# Altium PCB Smart_DCDC_v5.PCBDOC (part 1 of 2)
Units mm, origin at the board's own origin, x right, y up, seen from the top; angles counter-clockwise.
Board outline 122.55 x 122.29 mm, 2 copper layers (Top Layer, Bottom Layer); 183 components, 138 nets, 550 pads, 99 vias.
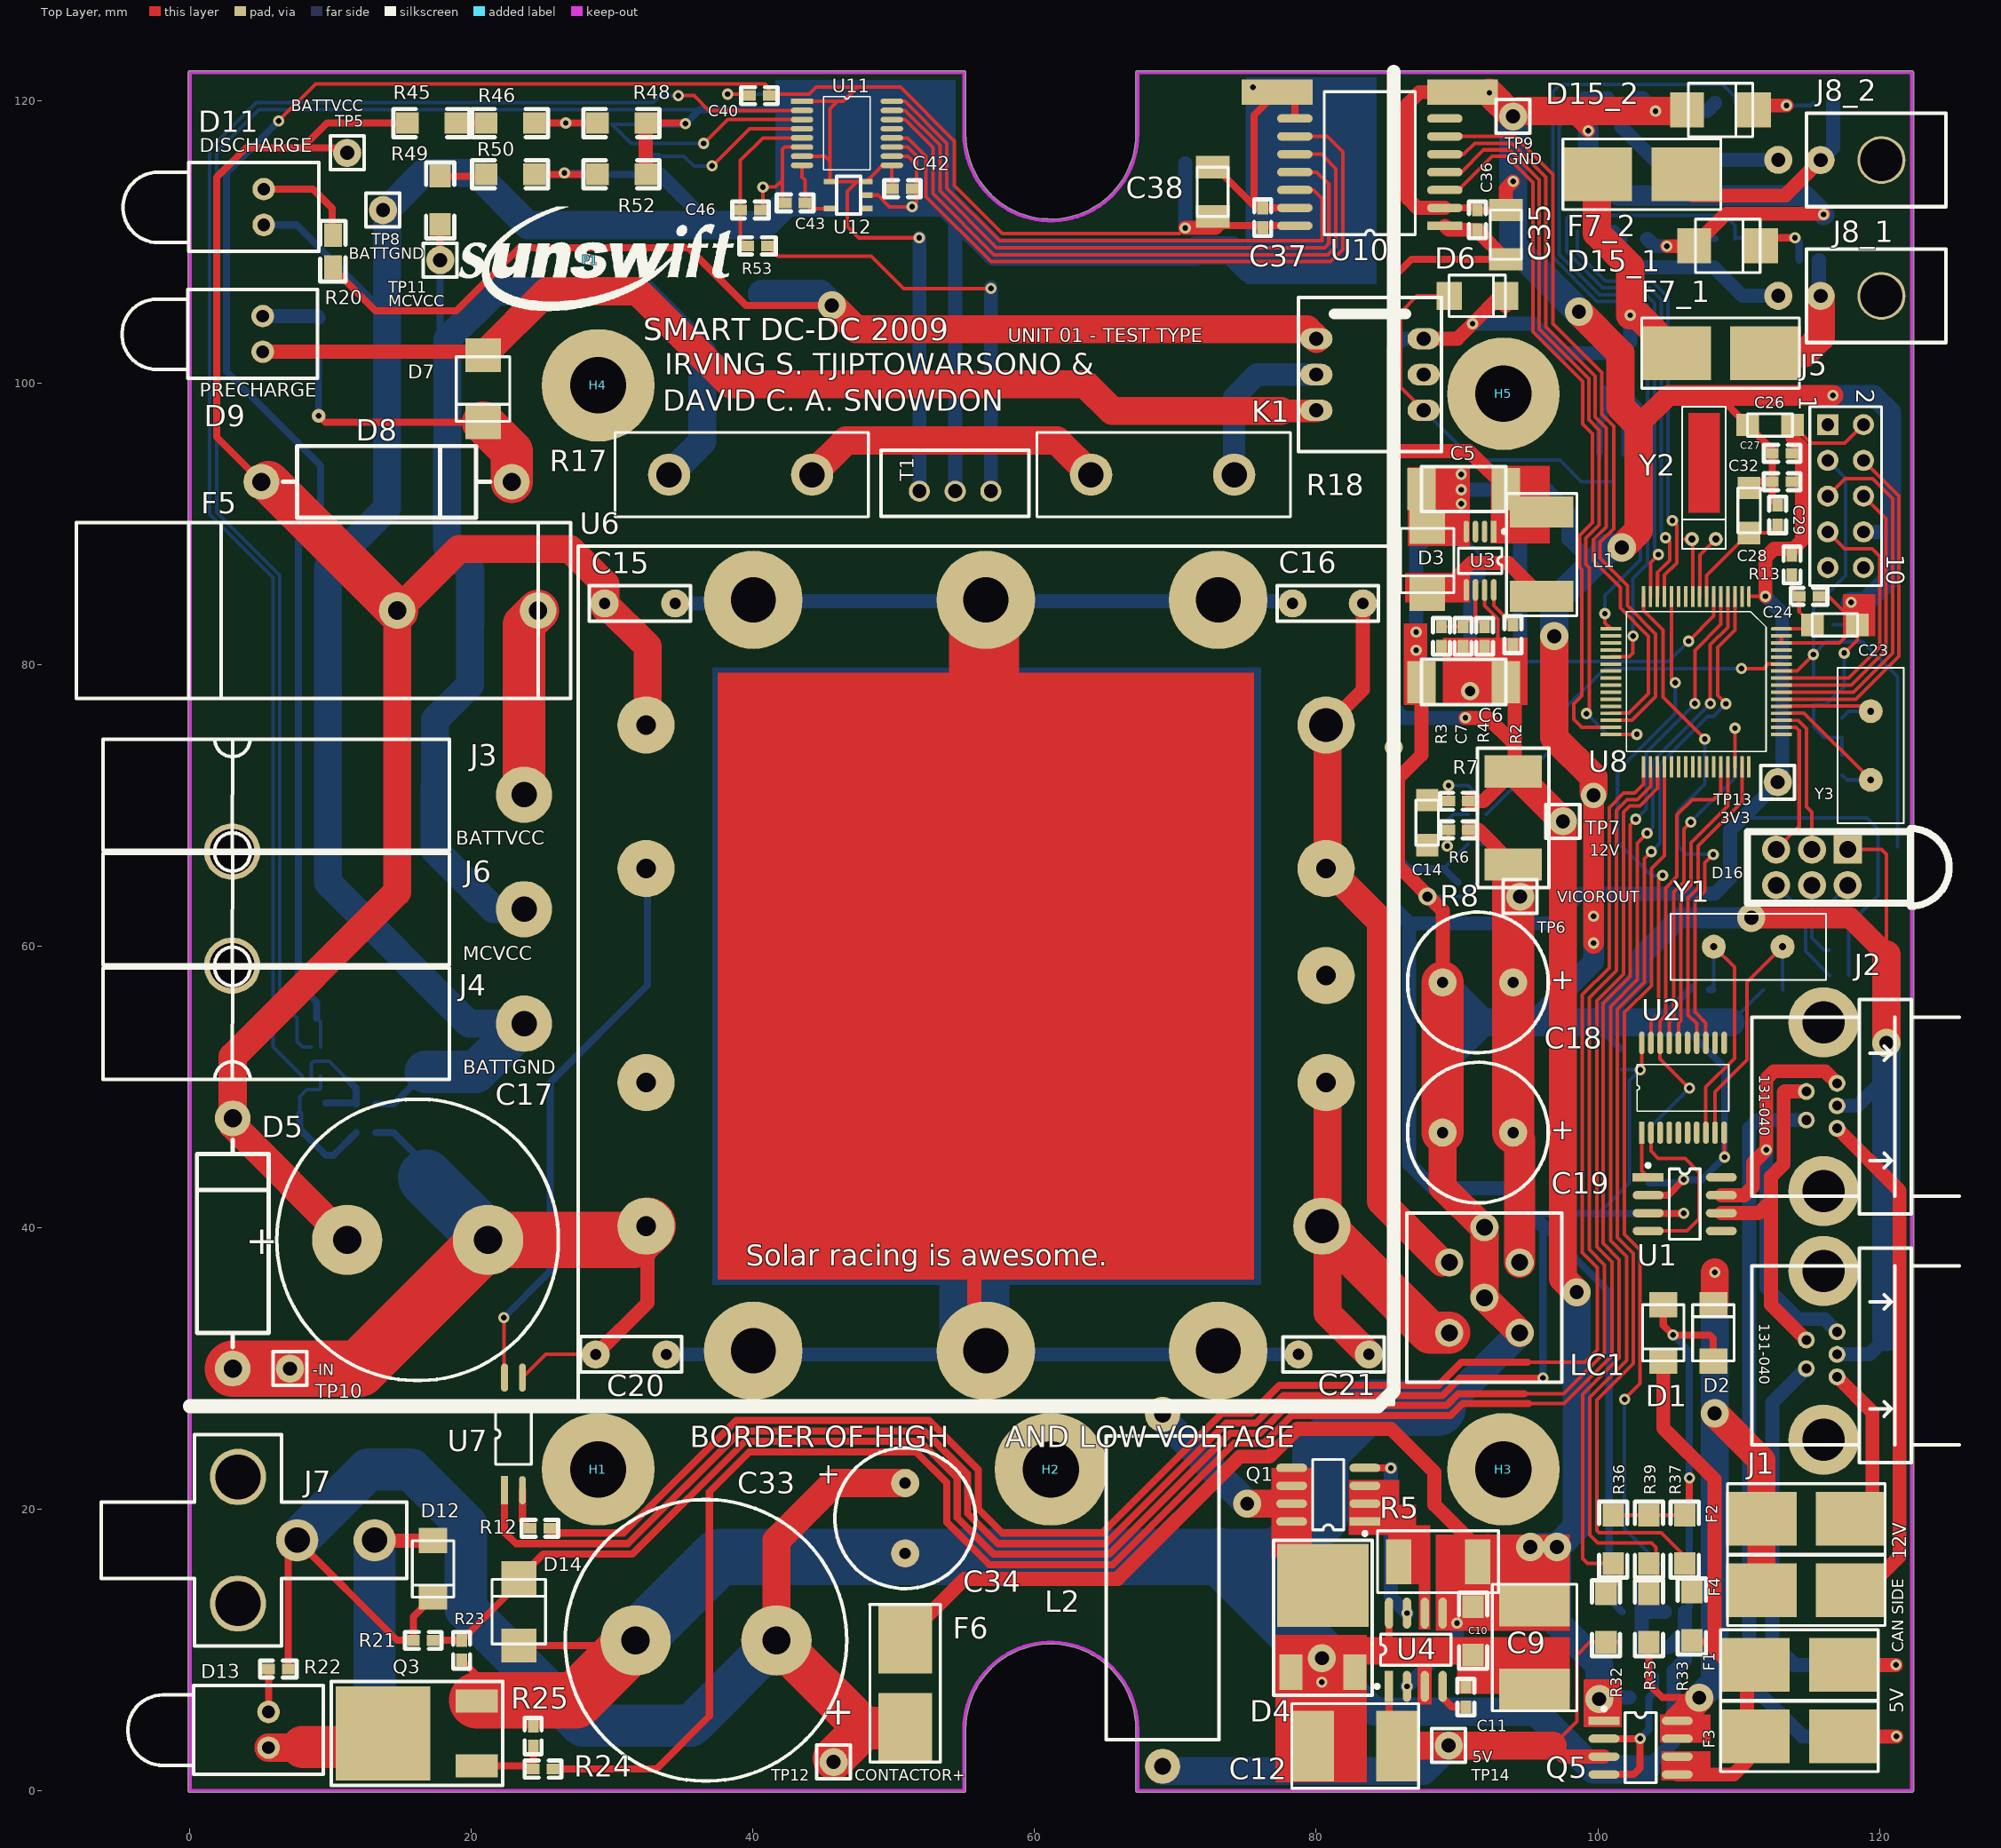
[diagram p0: Top Layer view]
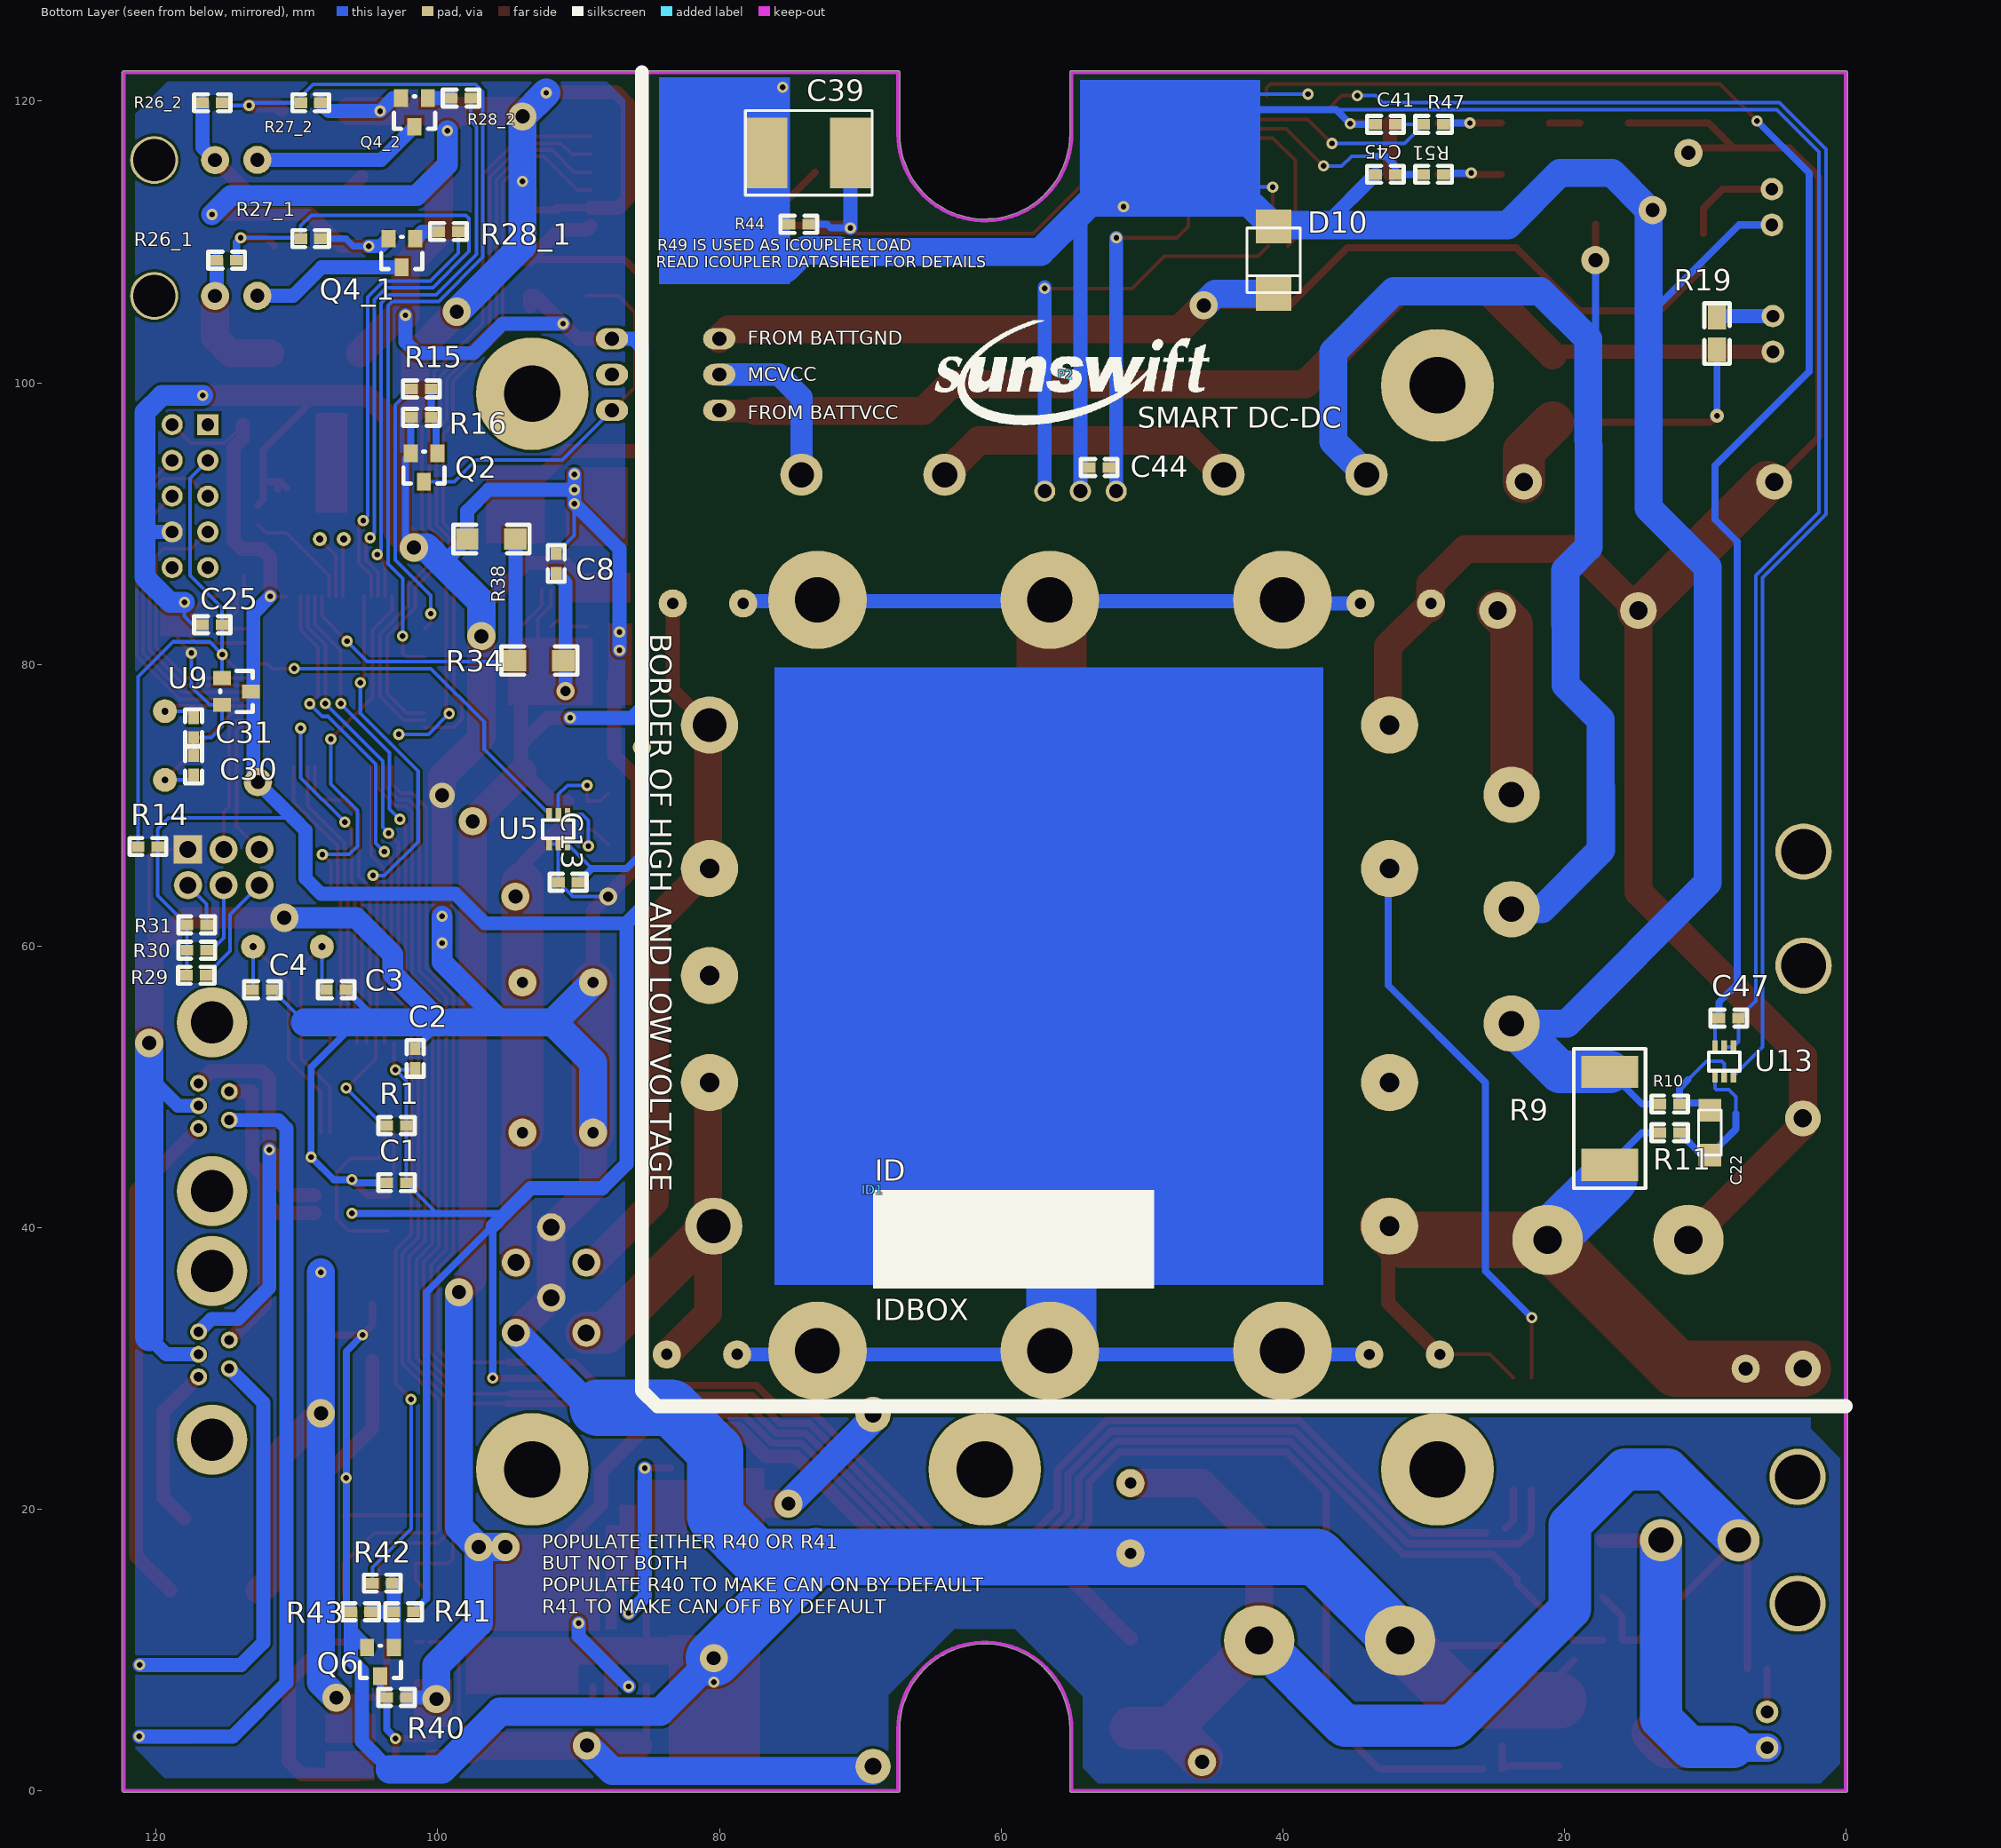
[diagram p1: Bottom Layer view, seen from below]

## Layer stack, top to bottom
Top Layer: signal copper 0.0356
Dielectric: dielectric 0.32, FR-4, Dk 4.8
Bottom Layer: signal copper 0.0356

## Board outline
0,-0.127 54.98,-0.127 ccw(c54.98,0) 55.107,0 55.107,4.33 ccw(c54.985,4.365) 55.112,4.365 cw(c61.15,4.365) 67.188,4.4 ccw(c67.31,4.365) 67.183,4.365 67.183,0 ccw(c67.31,0) 67.31,-0.127 122.3,-0.127 ccw(c122.3,0) 122.427,0 122.427,122.04 ccw(c122.3,122.04) 122.3,122.167 67.31,122.167 ccw(c67.31,122.04) 67.183,122.04 67.183,117.675 ccw(c67.31,117.675) 67.188,117.64 cw(c61.15,117.675) 55.112,117.675 ccw(c54.985,117.675) 55.107,117.71 55.107,122.04 ccw(c54.98,122.04) 54.98,122.167 0,122.167 ccw(c0,122.04) -0.127,122.04 -0.127,0 ccw(c0,0)

## Design rules (kind name [scope] priority, off if disabled: settings)
Clearance [All] p1: gap=0.2
ComponentClearance [All] p1: gap=0.4 collisioncheckmode=3 verticalgap=0.254 showdistances=FALSE
HoleSize [All] p1: absolutevalues=TRUE maxlimit=5 minlimit=0.2 maxpercent=80.000 minpercent=20.000
PolygonConnect PolygonConnect_1 [All vs IsNamedPolygon('POLYGND')] p1: connectstyle=Direct reliefconductorwidth=0.254 reliefentries=4 polygonreliefangle="90 Angle"
PolygonConnect [All] p2: connectstyle=Relief reliefconductorwidth=0.254 reliefentries=4 polygonreliefangle="90 Angle"
RoutingVias [All] p1: holewidth=0.711 width=1.27 viastyle="Through Hole" minholewidth=0.711 minwidth=1.27 maxholewidth=0.711 maxwidth=1.27
SilkscreenOverComponentPads [All] p1: minsilkscreentomaskgap=0.254
SolderMaskExpansion [All] p1: expansion=0.2
TestPointUsage [All] p1: valid=0 allowmultiple=FALSE
Testpoint [All] p1: side=15 testpointundercomponent=TRUE minsize=1.016 maxsize=2.54 preferedsize=1.524 minholesize=0 maxholesize=1.016 preferedholesize=0.813 testpointgrid=0.025 style=1023 order=0-112345678
Width 12V [(InNet('12V'))] p1 off: maxlimit=10 minlimit=1 preferedwidth=1
Width 3V3 [(InNet('3V3'))] p2 off: maxlimit=10 minlimit=0.5 preferedwidth=0.5
Width [All] p3: maxlimit=5 minlimit=0.2 preferedwidth=0.254 toplayer_prefwidth=2 bottomlayer_prefwidth=2 minimp=50.000000 maximp=50.000000 favimp=50.000000
21 further rules are at their usual default settings.

## Classes and differential pairs
channel class Switched_Outputs: 1 2
component class U_MSP430F149: C23 C24 C25 C26 C27 C28 C29 C30 C31 C32 J5 R13 R14 U8 U9 Y2 Y3
component class U_IsolatedADC: C35 C36 C37 C38 C39 C40 C41 C42 C43 C44 C45 C46 C47 R44 R45 R46 R47 R48 R49 R50 R51 R52 R53 T1 U10 U11 U12 U13
component class U_120-12V-DCDC: C13 C14 C15 C16 C17 C18 C19 C20 C21 C22 D5 F5 J3 J4 LC1 R6 R7 R8 R9 R10 R11 R12 TP5 TP6 TP7 TP8 TP9 TP10 U5 U6 U7
component class U_12to5VSwitcher-3A: C9 C10 C11 C12 D4 L2 Q1 R4 U4
component class U_3V-Switcher-50mA: C5 C6 C7 C8 D3 L1 R2 R3 R4 U3
component class U_3V3-CAN: C1 C2 C3 C4 D1 D2 F1 F2 F3 F4 J1 J2 R1 U1 U2 Y1
component class TopLevel: D16 H1 H2 H3 H4 H5 ID1 P1 R29 R30 R31 R32 R33 R34 R35 R36 R37 R38 R39 TP13 TP14
component class Precharge: C33 C34 D6 D7 D8 D9 D10 D11 D12 D13 D14 F6 J6 J7 J8 K1 Q2 Q3 R15 R16 R17 R18 R19 R20 R21 R22 R23 R24 R25 TP11 TP12
component class "CAN power switch": Q5 Q6 R40 R41 R42 R43
component class 2: D15_2 F7_2 J8_2 Q4_2 R26_2 R27_2 R28_2
component class 1: D15_1 F7_1 J8_1 Q4_1 R26_1 R27_1 R28_1

## Components (designator, comment, footprint, x,y, rotation, side; value= is the part's Value field where it differs from the comment)
C1 "100n" 0603 103.632,43.18 r180 bottom
C2 "100n" 0603 101.6,51.308 r90 bottom
C3 "27p" 0603 106.52,56.896 r0 bottom
C4 "27p" 0603 111.76,56.896 r0 bottom
C5 "4u7 35V" MCCT-CASEC 93.472,92.456 r180 top
C6 "4u7 35V" MCCT-CASEC 93.472,78.74 r180 top
C7 "1n" 0603 90.424,81.28 r90 top
C8 "100nF" 0603 91.592,86.457 r90 bottom
C9 "47u" KEMET_CASED 95.504,10.16 r270 top
C10 "0.47u" 1206 91.14,13.052 r270 top
C11 "100n" 0603 90.632,5.94 r90 top
C12 "330u" KEMET_CASED 82.772,3.164 r180 top
C13 "100n" 0603 91.44,64.516 r180 bottom
C14 "CAP POL3 10u" MCCT-CASEA 87.884,68.756 r90 top
C15 "4.7nF, 250V" POLYESTER-5 29.464,84.328 r0 top
C16 "4.7nF, 250V" POLYESTER-5 83.312,84.328 r180 top
C17 "220uF, 200V" ELECTROLYTIC-10-20 11.176,39.116 r0 top
C18 "1000uF" ELECTROLYTIC-5-10 93.98,57.404 r180 top
C19 "1000uF" ELECTROLYTIC-5-10 93.98,46.736 r180 top
C20 "4.7nF, 250V" POLYESTER-5 33.836,30.98 r180 top
C21 "4.7nF, 250V" POLYESTER-5 78.74,30.988 r0 top
C22 "CAP POL3 10u" MCCT-CASEA 9.652,46.736 r90 bottom
C23 "CAP POL3 10u" MCCT-CASEA 116.84,82.804 r0 top
C24 "100nF" 0603 114.3,84.836 r0 top
C25 "10nF" 0603 115.316,82.804 r0 bottom
C26 "CAP POL3 10u" MCCT-CASEA 112.232,97.004 r180 top
C27 "100nF" 0603 113.792,94.996 r180 top
C28 "CAP POL3 10u" MCCT-CASEA 110.744,90.932 r90 top
C29 "100nF" 0603 112.776,89.916 r90 top
C30 "18pF" 0603 117.348,72.136 r90 bottom
C31 "18pF" 0603 117.348,76.2 r270 bottom
C32 "100nF" 0603 113.792,92.964 r180 top
C33 "4700uF" ELECTROLYTIC-10-20 41.656,10.668 r180 top
C34 "1000uF" ELECTROLYTIC-5-10 50.8,21.844 r270 top
C35 "33u" MCCT-CASEB 93.472,112.268 r270 top
C36 "100n" 0603 91.44,112.268 r270 top
C37 "100n" 0603 76.2,112.422 r270 top
C38 "33u" MCCT-CASEB 72.644,115.316 r270 top
C39 "330u" KEMET_CASED 73.66,116.332 r0 bottom
C40 "100nF" 0603 41.148,120.396 r180 top
C41 "6n8" 0603 32.004,118.364 r0 bottom
C42 "100nF" 0603 51.308,113.792 r180 top
C43 "100nF" 0603 43.688,112.776 r180 top
C44 "100nF" 0603 52.324,93.98 r0 bottom
C45 "6n8" 0603 32.004,114.808 r0 bottom
C46 "100nF" 0603 39.116,112.268 r0 top
C47 "100n" 0603 7.62,54.864 r0 bottom
D1 "5V Transient Suppressor" SMA 104.648,32.512 r270 top
D2 "12V Transient Suppressor" SMA 108.204,32.512 r90 top
D3 "MBRS130" SMB 87.884,87.376 r270 top
D4 "50WQ06F" DPAK 80.472,14.576 r0 top
D5 "171V" DIODE-D1.2mm 3.048,47.752 r90 top
D6 "12V TVS" SMA 91.44,106.172 r0 top
D7 "1SMB5913BT3G" SMB 20.828,99.568 r270 top
D8 "DIODE" DIODE-D1.2mm 22.86,92.964 r0 top
D9 "YELLOW" LED-RA 5.176,104.74 r270 top
D10 "1SMB5913BT3G" SMB 40.64,108.712 r270 bottom
D11 "RED" LED-RA 5.248,113.756 r270 top
D12 "12V TVS" SMA 17.272,15.748 r270 top
D13 "GREEN" LED-RA 5.588,5.588 r270 top
D14 "SMLVT3V3" SMB 23.368,12.7 r90 top
D15_1 "SMLVT3V3" SMB 109.22,109.728 r0 top (schematic designator D15)
D15_2 "SMLVT3V3" SMB 108.712,119.38 r0 top (schematic designator D15)
D16 "1882-2781" LED_TRILEVEL 117.748,66.848 r270 top
F1 "125mA/3A" LITTELFUSE-154 114.316,8.924 r180 top
F2 "125mA/3A" LITTELFUSE-154 114.808,19.304 r180 top
F3 "3A" LITTELFUSE-154 114.316,3.844 r180 top
F4 "3A" LITTELFUSE-154 114.808,14.224 r180 top
F5 "3A" FUSE-BAYONET-RA 14.732,83.82 r0 top
F6 "FUSE" LITTELFUSE-154 50.8,7.62 r270 top
F7_1 "FUSE" LITTELFUSE-154 108.712,102.108 r0 top (schematic designator F7)
F7_2 "FUSE" LITTELFUSE-154 103.124,114.808 r0 top (schematic designator F7)
H1 "HOLE" #6 29,22.82 r0 top
H2 "HOLE" #6 61.15,22.82 r0 top
H3 "HOLE" #6 93.3,22.82 r0 top
H4 "HOLE" #6 29,99.82 r0 top
H5 "HOLE" #6 93.3,99.22 r0 top
ID1 "IDBOX" IDBOX 69.088,42.672 r180 bottom
J1 "CON5-S" TRIAD5F 114.808,29.972 r270 top
J2 "CON5-S" TRIAD5F 114.808,47.628 r270 top
J3 "POWERPOLE" POWERPOLE25A 37.324,70.736 r90 top
J4 "POWERPOLE" POWERPOLE25A 37.324,54.48 r90 top
J5 "Tritium JTAG Connector" HDR2X5 116.332,97.028 r270 top
J6 "POWERPOLE" POWERPOLE25A 37.324,62.608 r90 top
J7 "MINIFIT JR" MINIFITJR-2 7.62,17.78 r270 top
J8_1 "CON2" MICROFIT-2 115.824,106.172 r90 top (schematic designator J8)
J8_2 "CON2" MICROFIT-2 115.824,115.824 r90 top (schematic designator J8)
K1 "TK1-12V" TK1-12V 83.82,100.584 r270 top
L1 "330uH" 2220 96.012,84.836 r90 top
L2 "B82111EC22" PCH-45 69.088,14.224 r270 top
LC1 "BNX002" BNX002 91.948,32.512 r90 top
P1 "SUN_LOGO" SUNSWIFTLOGO 28.448,108.712 r0 top
P2 "SUN_LOGO" SUNSWIFTLOGO 55.372,100.584 r180 bottom (schematic designator P1)
Q1 "FDS4435" SO8 80.856,21.016 r90 top
Q2 "ZXM61N03F" SOT23-3 100.024,94.996 r0 bottom
Q3 "STD12NF06L" DPAK_N-MOSFET 13.716,4.064 r90 top
Q4_1 "ZXM61N03F" SOT23-3 101.6,110.236 r0 bottom (schematic designator Q4)
Q4_2 "ZXM61N03F" SOT23-3 100.704,120.212 r0 bottom (schematic designator Q4)
Q5 "IRF7316QTRPBF" SO8 103.04,3.048 r270 top
Q6 "ZXM61N03F" SOT23-3 103.124,10.16 r0 bottom
R1 "10k" 0603 103.632,47.244 r180 bottom
R2 "100k" 0603 93.98,82.804 r270 top
R3 "1R" 0603 88.9,81.28 r90 top
R4 "1R" 0603 91.948,81.28 r90 top
R5 "0R022" 2512 85.852,16.256 r0 top
R6 "6R8" 0603 89.408,68.248 r0 top
R7 "6R8" 0603 89.408,70.28 r0 top
R8 "0R01" CRA2512 93.98,69.088 r270 top
R9 "0R01" CRA2512 16.764,47.752 r90 bottom
R10 "6R8" 0603 13.208,48.768 r180 bottom
R11 "6R8" 0603 13.208,46.736 r180 bottom
R12 "100R" 0603 25.557,18.639 r180 top
R13 "100R" 0603 113.792,86.36 r90 top
R14 "10k" 0603 121.288,67.056 r180 bottom
R15 "100R" 0603 100.476,99.568 r0 bottom
R16 "10K" 0603 100.476,97.536 r0 bottom
R17 "100R" LTO100 44.196,93.472 r180 top
R18 "100R" LTO100 74.168,93.472 r180 top
R19 "220R" 0805 9.144,104.648 r270 bottom
R20 "220R" 0805 10.16,108.204 r90 top
R21 "1M" 0603 17.272,10.668 r180 top
R22 "3K3" 0603 5.588,8.636 r0 top
R23 "330K" 0603 19.304,10.668 r270 top
R24 "100R" 0603 25.784,1.524 r180 top
R25 "10K" 0603 24.384,4.572 r270 top
R26_1 "1M" 0603 114.3,108.712 r0 bottom (schematic designator R26)
R26_2 "1M" 0603 115.316,119.888 r0 bottom (schematic designator R26)
R27_1 "330k" 0603 109.728,110.236 r180 bottom (schematic designator R27)
R27_2 "330k" 0603 109.728,119.888 r180 bottom (schematic designator R27)
R28_1 "100R" 0603 98.552,110.744 r0 bottom (schematic designator R28)
R28_2 "100R" 0603 97.656,120.212 r0 bottom (schematic designator R28)
R29 "1K" 0603 117.856,57.912 r180 bottom
R30 "1K" 0603 117.812,59.704 r180 bottom
R31 "1K" 0603 117.812,61.496 r180 bottom
R32 "100k" 1206 100.584,10.544 r90 top
R33 "100k" 1206 106.68,10.668 r90 top
R34 "100k" 1206 91.088,80.264 r0 bottom
R35 "100k" 1206 103.632,10.544 r90 top
R36 "20K" 1206 101.092,16.132 r90 top
R37 "20K" 1206 106.172,16.132 r90 top
R38 "20K" 1206 94.488,88.9 r0 bottom
R39 "20K" 1206 103.632,16.132 r90 top
R40 "10K" 0603 103.632,6.604 r180 bottom
R41 "10K" 0603 103.124,12.7 r180 bottom
R42 "100R" 0603 104.648,14.732 r180 bottom
R43 "10K" 0603 106.172,12.7 r180 bottom
R44 "390R" 0603 73.66,111.252 r0 bottom
R45 "220k" 1206 15.456,118.452 r0 top
R46 "220k" 1206 21.044,118.452 r0 top
R47 "10R" 0603 29.972,118.364 r180 bottom
R48 "7k5" 1206 28.956,118.452 r0 top
R49 "220k" 1206 17.78,111.252 r90 top
R50 "220k" 1206 21.044,114.808 r0 top
R51 "10R" 0603 29.972,114.808 r180 bottom
R52 "7k5" 1206 28.956,114.808 r0 top
R53 "1K" 0603 39.624,109.728 r0 top
T1 "LM35DT" TO-220-up 54.356,92.299 r0 top
TP5 "TEST" TESTPOINT 11.176,116.332 r0 top
TP6 "TEST" TESTPOINT 94.488,63.5 r0 top
TP7 "TEST" TESTPOINT 97.52,68.85 r0 top
TP8 "TEST" TESTPOINT 13.716,112.268 r0 top
TP9 "TEST" TESTPOINT 93.98,118.92 r0 top
TP10 "TEST" TESTPOINT 7.112,29.972 r90 top
TP11 "TEST" TESTPOINT 17.78,108.712 r90 top
TP12 "TEST" TESTPOINT 45.72,2.032 r90 top
TP13 "TEST" TESTPOINT 112.776,71.628 r90 top
TP14 "TEST" TESTPOINT 89.408,3.2 r90 top
U1 "SN65HVD232" SO8 106.172,41.656 r270 top
U2 "MCP2515-I/ST" TSSOP20 103.124,46.736 r90 top
U3 "LTC1474" TSOP8 92.608,89.432 r270 top
U4 "MAX1626" SO8 87.076,10.004 r0 top
U5 "INA214" SC70-6 91.44,67.232 r180 bottom
U6 "VI-J00" VI-J00 32.4,75.692 r0 top
U7 "PC3H7J00000F" PC3H7 22.352,21.336 r90 top
U8 "MSP430F149" QFP64 110.739,84.828 r270 top
U9 "XC61CN2702MR" SOT23-3 115.316,79.028 r270 bottom
U10 "ADuM5401" SOIC_W16 89.132,111.152 r180 top
U11 "ADS8341" TSSOP16 43.48,119.996 r0 top
U12 "LM4120" SOT23-5 48.052,112.376 r90 top
U13 "INA214" SC70-6 8.636,52.832 r0 bottom
Y1 "16MHz" HC49/4H 105.156,59.944 r0 top
Y2 "32.768 KHz" WATCHA 106.68,88.9 r0 top
Y3 "7.3728 MHz" HC49/4H 119.38,79.756 r270 top

## Footprints (in the part's own frame and the unit in brackets; to place one, negate y for a bottom-side part, rotate by r counter-clockwise, add the part's x,y. Pads: shape width x height; smd on the part's side, far side on the other; paste and mask are expansions set on the pad)
0603 [mil]
  rect 35.43x30 smd: 1(0,0) 2(55,0)
  silkscreen extent -24,-24 79,24
0805 [mm]
  rect 1.7x1.27 smd: 1(0,0) 2(2.286,0)
  silkscreen extent -1,-0.9 3.3,0.9
1206 [mil]
  rect 62.99x60 smd: 1(0,0) 2(135,0)
  silkscreen extent -39,-39 173,39
2220 [mm]
  rect 2.2x4.5 smd: 1(0,0) 2(6,0)
  silkscreen extent -1.4,-2.5 7.3,2.5
2512 [mm]
  rect 1.8x3.2 smd: 1(0,0) 2(5.6,0)
  silkscreen extent -1.5,-2.2 7.1,2.2
#6 [mm]
  round 8 hole 4: 1(0,0)
BNX002 [mm]
  round 2 hole 1.2: 1(5,2.5) 2(0,2.5) 3(0,-2.5) 3(2.5,0) 3(7.5,0) 4(5,-2.5)
  silkscreen extent -3.5,-5.5 8.5,5.5
CRA2512 [mil]
  rect 90x160 smd: 1(-130,0) 2(130,0)
  silkscreen extent -195,-100 195,100
DIODE-D1.2mm [mm]
  round 2.54 hole 1.3: A(-17.78,0) K(0,0)
  silkscreen extent -16.26,-2.54 -1.52,2.54
DPAK [mm]
  rect 1.65x2.54 smd: 1(-2.28,-6.17) 1(2.28,-6.17)
  rect 6.48x5.9 smd: 2(0,0)
  silkscreen extent -3.5,-7.8 3.5,3.2
DPAK_N-MOSFET [mm] "STD12NF06L"
  rect 1.65x3 smd: 1(-2.3,-6.65) 3(2.3,-6.65)
  rect 6.7x6.7 smd: 2(0,0)
  silkscreen extent -3.68,-8.51 3.68,3.68
ELECTROLYTIC-5-10 [mm]
  round 2 hole 0.8: 1(0,0) 2(5,0)
  silkscreen extent -2.5,-5 7.5,5
ELECTROLYTIC-10-20 [mm]
  round 5 hole 2: 1(0,0) 2(10,0)
  silkscreen extent -5,-10 15,10
FUSE-BAYONET-RA [mm]
  round 2.6 hole 1.3: 1(0,0) 2(10,0)
  silkscreen extent -22.8,-6.25 12.3,6.25
HC49/4H [mm]
  round 1.7 hole 0.5: 1(3.085,0) 2(7.965,0)
  silkscreen extent 0,-2.35 11.05,2.35
HDR2X5 [mm] "Connector; Header; 5x2 Position"
  rect 1.5x1.5 hole 0.9: 1(0,0)
  round 1.5 hole 0.9: 2(0,2.54) 3(2.54,0) 4(2.54,2.54) 5(5.08,0) 6(5.08,2.54) 7(7.62,0) 8(7.62,2.54) 9(10.16,0) 10(10.16,2.54)
  silkscreen extent -1.27,-1.27 11.43,3.81
IDBOX [mm] "Infobox"
  silkscreen extent 0,-7 19.95,0
KEMET_CASED [mm]
  rect 3x5 smd: 1(-3,0) 2(3,0)
  silkscreen extent -4.5,-3 4.5,3
LED-RA [mm]
  round 1.6 hole 0.9: A(0,0) K(2.54,0)
  silkscreen extent -1.89,-10 4.43,3.9
LED_TRILEVEL [mm]
  rect 2x2 hole 1.2: 1(0,0)
  round 2 hole 1.2: 2(0,-2.54) 3(0,-5.08) 4(2.54,-5.08) 5(2.54,-2.54) 6(2.54,0)
  silkscreen extent -1.49,-7.11 4.03,7.21
LITTELFUSE-154 [mm]
  rect 5x3.81 smd: 1(-3.185,0) 2(3.185,0)
  silkscreen extent -5.6,-2.51 5.6,2.5
LTO100 [mm]
  round 3 hole 1.8: 1(0,0) 2(10.16,0)
  silkscreen extent -4,-3 14,3
MCCT-CASEA [mm]
  rect 1.6x1.6 smd: 1(-1.6,0) 2(1.6,0)
  silkscreen extent -1.6,-0.8 1.6,0.8
MCCT-CASEB [mm]
  rect 1.6x2.4 smd: 1(0,0) 2(3.5,0)
  silkscreen extent 0,-1.1 3.5,1.1
MCCT-CASEC [mm]
  rect 2x3 smd: 1(0,0) 2(6,0)
  silkscreen extent 0,-1.6 6,1.6
MICROFIT-2 [mm]
  round 3.4 hole 3: 0(0,-4.32)
  round 2 hole 1: 1(0,0) 2(0.01,3.01)
  silkscreen extent -3.31,-8.91 3.33,1.01
MINIFITJR-2 [mm]
  round 4 hole 3.2: 0(-4.5,-4.2) 0(4.5,-4.2)
  round 3 hole 1.8: 1(0,0) 2(0,5.5)
  silkscreen extent -7.5,-13.9 7.5,7.8
PC3H7 [mm]
  rect 2x0.5 smd: 1(0,0)
  oval 2x0.5 smd: 2(0,-1.27) 3(8,-1.27) 4(8,0)
  silkscreen extent 1.84,-1.91 6.16,0.64
PCH-45 [mm]
  round 2.5 hole 1.2: 1(-12.5,0) 2(12.5,0)
  silkscreen extent -10.96,-4 10.6,4
POLYESTER-5 [mm]
  round 2 hole 0.8: 1(0,0) 2(5,0)
  silkscreen extent -1.1,-1.27 6.1,1.25
POWERPOLE25A [mm]
  round 4 hole 1.8: 1(0,13.589)
  silkscreen extent -3.95,18.9 3.95,43.5
QFP64 [mm]
  oval 1.5x0.25 smd: 1(0.008,-0.005)
  rect 1.5x0.25 smd: 2(0.008,-0.505) 3(0.008,-1.005) 4(0.008,-1.505) 5(0.008,-2.005) 6(0.008,-2.505) 7(0.008,-3.005) 8(0.008,-3.505) 9(0.008,-4.005) 10(0.008,-4.505) 11(0.008,-5.005) 12(0.008,-5.505) 13(0.008,-6.005) 14(0.008,-6.505) 15(0.008,-7.005) 16(0.008,-7.505) 33(12.108,-7.505) 34(12.108,-7.005) 35(12.108,-6.505) 36(12.108,-6.005) 37(12.108,-5.505) 38(12.108,-5.005) 39(12.108,-4.505) 40(12.108,-4.005) 41(12.108,-3.505) 42(12.108,-3.005) 43(12.108,-2.505) 44(12.108,-2.005) 45(12.108,-1.505) 46(12.108,-1.005) 47(12.108,-0.505) 48(12.108,-0.005)
  rect 0.25x1.5 smd: 17(2.308,-9.805) 18(2.808,-9.805) 19(3.308,-9.805) 20(3.808,-9.805) 21(4.308,-9.805) 22(4.808,-9.805) 23(5.308,-9.805) 24(5.808,-9.805) 25(6.308,-9.805) 26(6.808,-9.805) 27(7.308,-9.805) 28(7.808,-9.805) 29(8.308,-9.805) 30(8.808,-9.805) 31(9.308,-9.805) 32(9.808,-9.805) 49(9.808,2.295) 50(9.308,2.295) 51(8.808,2.295) 52(8.308,2.295) 53(7.808,2.295) 54(7.308,2.295) 55(6.808,2.295) 56(6.308,2.295) 57(5.808,2.295) 58(5.308,2.295) 59(4.808,2.295) 60(4.308,2.295) 61(3.808,2.295) 62(3.308,2.295) 63(2.808,2.295)
  oval 0.25x1.5 smd: 64(2.308,2.295)
  silkscreen extent 1.09,-8.72 11.02,1.21
SC70-6 [mm]
  rect 0.4x0.9 smd: 1(-0.65,0) 2(0,0) 3(0.65,0) 4(0.65,2.1) 5(0,2.1) 6(-0.65,2.1)
  silkscreen extent -1.1,0.4 1.1,1.7
SMA [mm]
  rect 1.8x2 smd: A(-2,0) K(2,0)
  silkscreen extent -2,-1.48 2,1.48
SMB [mm]
  rect 2.4x2.5 smd: A(-2.385,0) K(2.385,0)
  silkscreen extent -2.28,-1.9 2.3,1.9
SO8 [mm]
  rect 0.6x2.2 smd: 1(-1.905,-2.6)
  oval 0.6x2.2 smd: 2(-0.635,-2.6) 3(0.635,-2.6) 4(1.905,-2.6) 5(1.905,2.6) 6(0.635,2.6) 7(-0.635,2.6) 8(-1.905,2.6)
  silkscreen extent -2.88,-2.72 2.5,1.1
SOIC_W16 [mm]
  rect 2.52x0.6 smd: 1(0,0)
  oval 2.52x0.6 smd: 2(0,-1.27) 3(0,-2.54) 4(0,-3.81) 5(0,-5.08) 6(0,-6.35) 7(0,-7.62) 10(10.65,-7.62) 11(10.65,-6.35) 12(10.65,-5.08) 13(10.65,-3.81) 14(10.65,-2.54) 15(10.65,-1.27) 16(10.65,0)
  rect 5.04x1.8 smd: 8(-1.26,-9.49) 9(11.91,-9.49)
  silkscreen extent 2.09,-9.53 8.55,0.64
SOT23-3 [mm]
  rect 1x1.25 smd: 1(0,0) 2(1.905,0) 3(0.965,2.032)
  silkscreen extent -0.51,-0.13 2.41,2.16
SOT23-5 [mm]
  rect 0.4x0.9 smd: 1(0,0) 2(0.953,0) 3(1.91,0) 4(1.91,2.59) 5(0,2.59)
  silkscreen extent -0.4,0.4 2.3,2.1
SUNSWIFTLOGO [mm] "Sunswift Logo"
  silkscreen extent -9.32,-3.58 10.19,3.81
TESTPOINT [mm] "Test point pad"
  round 2 hole 1: 0(0,0)
  silkscreen extent -1.2,-1.2 1.2,1.2
TK1-12V [mil]
  oval 60x90 hole 39.37: 1(-100,150) 2(0,150) 3(100,150) 4(-100,-150) 5(0,-150) 6(100,-150)
  silkscreen extent -215,-200 215,200
TO-220-up [mm]
  round 1.5 hole 1: 1(-2.54,0) 2(2.54,0) 3(0,0)
  silkscreen extent -5.25,-1.8 5.25,2.9
TRIAD5F [mm]
  round 5 hole 3: 0(-6.934,1.219) 0(5.055,1.219)
  round 1.2 hole 0.7: 1(0,0) 2(0.584,2.184) 3(-1.016,2.184) 4(-2.616,2.184) 5(-2.032,0)
  silkscreen extent -8.56,-3.86 6.68,10.87
TSOP8 [mm]
  rect 1.55x0.4 smd: 1(0,0)
  oval 1.55x0.4 smd: 2(0,-0.65) 3(0,-1.3) 4(0,-1.95) 5(4.15,-1.95) 6(4.15,-1.3) 7(4.15,-0.65) 8(4.15,0)
  silkscreen extent -0.12,-2.52 2.98,0.88
TSSOP16 [mm]
  rect 1.6x0.4 smd: 1(0,0)
  oval 1.6x0.4 smd: 2(0,-0.65) 3(0,-1.3) 4(0,-1.95) 5(0,-2.6) 6(0,-3.25) 7(0,-3.9) 8(0,-4.55) 9(6.38,-4.55) 10(6.38,-3.9) 11(6.38,-3.25) 12(6.38,-2.6) 13(6.38,-1.95) 14(6.38,-1.3) 15(6.38,-0.65) 16(6.38,0)
  silkscreen extent 1.53,-4.88 4.85,0.33
TSSOP20 [mm]
  rect 1.6x0.4 smd: 1(0,0)
  oval 1.6x0.4 smd: 2(0,-0.65) 3(0,-1.3) 4(0,-1.95) 5(0,-2.6) 6(0,-3.25) 7(0,-3.9) 8(0,-4.55) 9(0,-5.2) 10(0,-5.85) 11(6.38,-5.85) 12(6.38,-5.2) 13(6.38,-4.55) 14(6.38,-3.9) 15(6.38,-3.25) 16(6.38,-2.6) 17(6.38,-1.95) 18(6.38,-1.3) 19(6.38,-0.65) 20(6.38,0)
  silkscreen extent 1.53,-6.18 4.85,0.33
VI-J00 [mm]
  round 7 hole 3.2: 0(7.62,-44.45) 0(7.62,8.89) 0(24.13,-44.45) 0(24.13,8.89) 0(40.64,-44.45) 0(40.64,8.89)
  round 4.064 hole 1.4: 1(0,0) 2(0,-10.2) 3(0,-25.4) 4(0,-35.6) 6(48.3,-10.2) 7(48.3,-17.8) 8(48.3,-25.4)
  round 4.064 hole 2.4: 5(48.3,0) 9(48,-35.6)
  silkscreen extent -4.83,-48.26 53.09,12.7
WATCHA [mm]
  round 1 hole 0.5: 1(0,0) 2(1.7,0)
  Top Layer region: -0.25,1.85 2,1.85 2,8.95 -0.25,8.95
  silkscreen extent -0.7,-0.7 2.4,9.4

## Part data
C1 C2 C3 C4 C7 C8 C9 C10 C11 C12 C13 C15 C16 C20 C21 C24 C25 C27 C29 C30 C31 C32 C35 C36 C37 C38 C39 C40 C41 C42 C43 C44 C45 C46 C47: library part CAP, "Capacitor"
C5 C6: library part "Cap Pol3", "Polarized Capacitor (Surface Mount)"
C14 C22 C23 C26 C28: library part "CAP POL3", "Polarized Capacitor (Surface Mount)"
C17 C18 C19 C33 C34: library part "CAPACITOR POL", "Capacitor"
D1 D2 D5 D6 D12: library part DIODE, "Diode"
D3: library part "D SCHOTTKY", "Schottky Diode"
D4 D8: "Diode"
D7 D10: library part ZENER1, "Zener Diode"
D9 D11 D13: library part LED
D14 D15_1 D15_2: library part ZENER1, "TVS"
D16: library part LED-TRILEVEL, "Three level LED"
F1 F2 F3 F4: library part FUSE2, "Fuse"
F5: library part FUSE1, "Fuse"
F6 F7_1 F7_2: "Fuse"
H1 H2 H3 H4 H5: "Hole"
J1 J2: "Connector, 2 pin, with shield @ S"
J3 J4 J6: library part CON1
J5: library part 430F_JTAG_TRITIUM, "Tritium JTAG interface for MSP430"
J7: library part CON2
J8_1 J8_2: "Microfit 2-way PCB Connector"
K1: "SPCO 12V 2A Relay"
L1: library part Inductor, "Inductor"
L2: library part INDUCTOR
LC1: "10A Switchmode Supply Output Filter"
Q1: library part SI4425DY, "FDS4435P Channel Mosfet"
Q2 Q4_1 Q4_2 Q6: library part ZXM61N02F, "1.7A, 20V N-Channel Enhancement mode FET"
Q3: "N-type MOSFET"
Q5: "Dual P-type MOSFET IC"
R1 R4 R5 R6 R7 R10 R11 R15 R21 R22 R23 R24 R26_1 R26_2 R27_1 R27_2 R28_1 R28_2 R32 R33 R34 R35 R36 R37 R38 R39 R42 R44 R45 R46 R48 R49 R50 R52: library part RES1
R2 R3 R12 R13 R14 R16 R17 R18 R19 R20 R25 R29 R30 R31 R40 R41 R43 R47 R51 R53: library part RES1, "Resistor"
R8 R9: library part CRA2512, "Current Sense Resistor"
T1: library part LM35DZ, "Temperature Sensor"
TP5 TP6 TP7 TP8 TP9 TP10 TP11 TP12 TP13 TP14: "TEST POINT"
U1: "3.3V CAN Transciever"
U2: library part MCP2515X/ST, "MCP2510 CAN Controller"
U3: "Step-down converter"
U5 U13: "Current Sensor"
U6: "VI-J00 Switch Mode DC-DC Converter"
U7: "Opto-coupler"
U8: library part MSP430F14X
U9: library part XC61F, "SOT23 reset generator"
U10: "Optocoupler w/ DCDC"
U12: "Precision LDO voltage reference"
Y1 Y2 Y3: library part CRYSTAL, "Crystal"

## Free pads (board coordinates)
  round 4 hole 3.2: 0(3,58.6) 0(3,66.7)

## Via types
v1: diameter 0.8, hole 0.4, Top Layer to Bottom Layer, 80 vias
v2: diameter 2, hole 1, Top Layer to Bottom Layer, 14 vias
v3: diameter 1.27, hole 0.711, Top Layer to Bottom Layer, 3 vias
v4: diameter 1, hole 0.4, Top Layer to Bottom Layer, 1 vias
v5: diameter 1.8, hole 1, Top Layer to Bottom Layer, 1 vias

## Nets (pads, with @x,y where several pads share a name; then routed paths per layer and width w, separated by ;. In a path a pad name is that pad's centre, name@x,y a point inside that pad or via, vN(x,y) a via of type N, cw(c..) or ccw(c..) an arc to the next point about the centre after c; other vN are vias at no path point)
3V3: C1.2 C2.1 C5.1 C13.2 C26.1 C27.1 C32.1 C35.2 C36.2 J5.2 L1.2 R1.2 R13.2 R14.2 R29.1 R30.1 R31.1 R41.2 TP13.0 U1.3 U2.20 U3.1 U5.3 U7.1 U8.1 U9.3 U10.1 | length 355.2
  Top Layer w0.254: v1@103.124,51.324 U2.20@103.124,53.116 ; U8.1@110.739,84.828 v1(111.9,84.828) ; 113.832,96.064 C26.1@113.832,97.004 115.136,95.7 117.544,95.7 J5.2@118.872,97.028
  Top Layer w0.508: U7.1@22.352,21.336 22.352,18.348 23.16,17.54 31.12,17.54 39.12,25.54 52.185,25.54 55.24,22.485 55.24,19.685 57.385,17.54 63.588,17.54 ; 63.3,17.54 65.041,17.54 73.593,26.092 75.693,26.092 77.671,28.07 88.97,28.07 90.2,29.3 v1(96.1,29.3) ; 85.86,95.14 85.4,95.6 85.4,107.4 86.768,108.768 C35.2@93.472,108.768 ; U1.3@103.5,41 103.572,41 v1(106.1,41)
  Top Layer w1: v3(85.5,74.1) 85.5,94.78 85.86,95.14 90.86,95.14 C5.1@93.85,92.15 ; U10.1@89.132,111.152 89.413,110.871 C36.2@91.44,110.871 91.44,110.8 C35.2@93.472,108.768 ; C35.2@93.843,108.768 C35.2@93.98,108.768 ; v1(111.9,84.828) 111.9,87.6 112.5,88.2 113.792,88.2 113.9,88.2 114.5,88.8 114.5,92.964 114.5,94.996 114.5,95.396 114.346,95.55 113.832,96.064 C26.1@113.832,97.004
  Bottom Layer w0.254: 89.059,65.501 U5.3@90.79,67.232 ; 100.055,41 C1.2@102.235,43.18 R1.2@102.235,47.244 102.235,50.435 v1(103,51.2) C2.1@101.708,51.2 ; 110.3,69.1 119.1,69.1 119.891,68.309 R14.2@119.891,67.056 119.891,63.575 R31.1@117.812,61.496 R30.1@117.812,59.704 R29.1@117.812,57.912
  Bottom Layer w0.508: 95.2,41 100.055,41 v1(106.1,41) ; v1(96.1,29.3) 96.1,40.1 100.8,35.4 100.8,13.627 R41.2@101.727,12.7
  Bottom Layer w0.512: 85.5,66.6 86.6,65.5 89.059,65.5 C13.2@90.043,64.516
  Bottom Layer w1: v3(85.5,74.1) 85.5,66.6 85.5,62.7 86.6,61.6 ; 96.1,40.1 95.2,41 93.4,42.8 88.3,42.8 86.6,44.5 86.6,61.6 ; v1(111.9,84.828) 113.1,83.628 113.1,78.063 113.1,71.9 110.3,69.1 109.4,68.2 109.4,64.8 108.3,63.7 98.749,63.7 96.649,61.6 86.6,61.6
5V: C12.1 L2.2 Q5.3 R32.1 TP14.0 U4.1 | length 49.8
  Top Layer w0.254: 96.8,3.2 98.5,4.9 98.5,9.6 99.444,10.544 R32.1@100.584,10.544 ; R32.1@101.092,10.544 101.568,10.544
  Top Layer w0.5: C12.1@85.171,3.717 U4.1@85.171,7.404
  Top Layer w1: 96.8,3.2 97.587,2.413 Q5.3@100.44,2.413
  Top Layer w2: C12.1@85.808,3.2 TP14.0@89.408,3.2 96.8,3.2
  Bottom Layer w2: L2.2@69.088,1.4 87.608,1.4 TP14.0@89.408,3.2
"5V MEASURE": R32.2 R36.1 U8.5 | length 78.7
  Top Layer w0.254: R32.2@100.584,13.973 101.568,14.957 101.568,16.132 R36.1@101.092,16.132 99.268,16.132 98.92,16.48 98.92,28.155 101.52,30.755 101.52,37.726 100.38,38.866 100.38,55.915 102.3,57.835 102.3,68.6 v1(102.7,69) ; v1(106.89,77.21) 106.89,80.99 108.739,82.839 108.739,84.82 U8.5@108.739,84.828
  Bottom Layer w0.254: v1(102.7,69) 103.42,69.72 103.42,73.74 v1(106.89,77.21)
12V: C6.1 C7.1 C8.1 C9.1 C10.1 D6.K F6.1 F7_1.1 F7_2.1 K1.1 Q5.1 R2.2 R3.1 R4.1 R5.2 R7.2 R8.1 R34.1 R40.2 TP7.0 U3.7 U4.2 U4.5 | length 233.9
  Top Layer w0.254: U3.7@91.958,85.282 91.958,84.171 92.9,83.229 92.9,81.4
  Top Layer w1: F6.1@50.8,10.805 55.037,15.042 64.442,15.042 65.895,15.042 74.575,23.722 76.675,23.722 78.653,25.7 85.3,25.7 88.4,22.6 88.4,20.3 R5.2@91.936,16.764 ; K1.1@87.63,103.124 90.024,103.124 v1(91.1,104.2) 93.072,106.172 D6.K@93.272,106.172 ; v1(90.6,76.2) 92.2,76.2 94.104,74.296 ; R7.2@90.805,70.28 91.87,70.28 R8.1@93.98,72.39 ; R5.2@92.168,16.608 92.168,16.764 R5.2@92.168,17.732 ; 92.5,80.4 94.104,78.796 94.104,74.296 ; D6.K@93.2,106.1 D6.K@93.272,106.172 ; D6.K@93.337,106.09 D6.K@93.272,106.172 ; D6.K@93.44,105.46 D6.K@93.44,106.172 D6.K@93.272,106.172 ; R8.1@94.1,72.5 94.104,74.296
  Top Layer w2: R8.1@93.98,72.39 TP7.0@97.52,68.85 97.52,36.38 v2(98.5,35.4) ; F7_2.1@99.939,114.808 99.939,110.621 102.3,108.26 v1(102.3,104.8) 102.835,104.8 F7_1.1@105.527,102.108
  Bottom Layer w1: v1(86.441,7.404) 90,10.963 v1(90,11.9) ; K1.1@87.63,103.124 86.124,103.124 85.5,102.5 85.5,76.9 86.2,76.2 v1(90.6,76.2) ; v3(90.932,78.1) 90.932,85.797 C8.1@91.592,86.457 ; v1(91.1,104.2) 95.4,104.2 97.5,102.1 101.5,102.1 102.3,102.9 v1(102.3,104.8) ; v2(100.1,6.5) 100.204,6.604 R40.2@102.235,6.604
  Bottom Layer w2: v2(95.2,17.3) v2(97.1,17.3) ; v2(98.5,35.4) 98.5,18.7 v2(97.1,17.3) ; v2(100.1,6.5) 100.1,8.9 97.1,11.9 v2(97.1,17.3)
"12V MEASURE": R34.2 R38.1 U8.6 | length 25.4
  Top Layer w0.256: v1(106.45,81.65) 108.239,83.439 108.239,84.82 U8.6@108.239,84.828
  Bottom Layer w0.254: R34.2@94.332,80.235 94.439,80.342 94.488,80.391 94.679,80.2 105,80.2 v1(106.45,81.65) ; R34.2@94.488,80.293 R34.2@94.517,80.264
  Bottom Layer w1: R34.2@94.488,80.293 94.488,80.391 R38.1@94.488,88.9
-IN: C17.2 C20.2 D5.A R9.1 R11.1 TP10.0 U6.4 U7.3 | length 62.3
  Top Layer w0.254: U7.3@23.622,29.336 25.266,30.98 C20.2@28.836,30.98
  Top Layer w1: C20.2@28.836,30.98 32.512,34.656 32.512,40.092 U6.4@32.512,40.132
  Top Layer w2: C17.2@21.176,39.116 C17.2@22.104,40.044
  Top Layer w4: D5.A@3.048,29.972 12.032,29.972 C17.2@21.176,39.116 31.496,39.116 32.436,40.056 U6.4@32.512,40.132
  Bottom Layer w0.5: R11.1@13.208,46.736 14.478,46.736 R9.1@16.764,44.45
  Bottom Layer w4: R9.1@16.764,43.528 C17.2@21.176,39.116
/RESET: C25.1 J5.3 R14.1 U8.58 U9.1 | length 39.1
  Top Layer w0.254: U8.58@113.039,79.528 114.144,79.528 v1(115.316,80.7)
  Bottom Layer w0.254: U9.1@115.316,79.028 v1(115.316,80.7) ; J5.3@116.332,94.488 117.6,93.22 117.6,86.3 115.316,84.016 C25.1@115.316,82.804 v1(115.316,80.7) ; R14.1@121.288,67.056 121.288,79.112 118.8,81.6 116.216,81.6 v1(115.316,80.7)
ADC0: U5.6 U8.59 | length 26.5
  Top Layer w0.254: v1(110.2,79.7) 111.772,79.7 112.1,80.028 113.033,80.028 U8.59@113.039,80.028
  Bottom Layer w0.254: U5.6@92.09,69.332 96.7,73.942 96.7,75.9 100.5,79.7 v1(110.2,79.7)
ADC1: U8.60 | length 0
  Top Layer w0.254: U8.60@113.033,80.528 U8.60@113.039,80.528
ADC2: U8.61
ADC3: U8.2
ADC4: R33.2 R37.1 U8.3 | length 82
  Top Layer w0.254: v1(103.8,66.7) 103.3,66.2 103.3,57.421 101.38,55.501 101.38,39.28 102.52,38.14 102.52,30.341 99.92,27.741 99.92,18.48 100.1,18.3 104.512,18.3 106.426,16.386 106.68,16.132 R33.2@106.68,14.097 R33.2@106.68,13.973 ; v1(109.1,77.2) 108.5,77.8 108.5,81.2 109.739,82.439 109.739,84.82 U8.3@109.739,84.828
  Bottom Layer w0.254: v1(103.8,66.7) 104.4,67.3 104.4,72.92 107.78,76.3 108.2,76.3 v1(109.1,77.2)
ADC5: R35.2 R39.1 U8.4 | length 80
  Top Layer w0.254: v1(103.5,68) 102.8,67.3 102.8,57.6 100.9,55.7 100.9,39.081 102.04,37.941 102.04,30.54 99.44,27.94 99.44,18.16 100,17.6 103.8,17.6 104.14,17.26 R39.1@104.14,16.132 ; R35.2@104.188,13.973 R39.1@104.188,16.084
  Top Layer w0.256: v1(107.99,77.21) 107.99,81.39 109.239,82.639 109.239,84.82 U8.4@109.239,84.828
  Bottom Layer w0.254: v1(103.5,68) 103.92,68.42 103.92,73.14 v1(107.99,77.21)
ADC_CS: U8.32 U10.4 | length 54.8
  Top Layer w0.254: U10.4@89.132,114.962 90.316,114.962 91.9,116.546 93.712,116.546 95.844,114.414 95.844,103.804 99.365,100.283 99.365,97.374 100.1,96.639 100.1,89.9 99.154,88.954 99.154,87.088 99.4,86.842 99.4,76.7 v1(99.2,76.5) ; U8.32@100.939,75.028 v1(102.772,75.028)
  Bottom Layer w0.254: v1(99.2,76.5) 100.672,75.028 v1(102.772,75.028) 102.772,74.828 v1@102.8,74.8
ADC_SIMO0: U8.29 U10.5 | length 52.2
  Top Layer w0.254: U10.5@89.132,116.232 90.484,116.232 91.252,117 93.9,117 96.298,114.602 96.298,103.992 99.819,100.471 99.819,97.562 100.6,96.781 100.6,89.758 99.697,88.855 99.697,88.461 99.697,87.361 101.6,85.458 101.6,84 103.6,82 103.6,77.92 102.208,76.528 U8.29@100.939,76.528
AGND: U8.11
AREF: U8.10
AUX1_SW: R28_1.1 U8.13 | length 31.1
  Top Layer w0.254: U8.13@104.739,84.828 104.739,86.339 105.6,87.2 105.6,89.9 v1(105.3,90.2)
  Bottom Layer w0.256: R28_1.1@98.552,110.744 98.552,109.208 100.533,107.227 103.833,107.227 104.967,106.093 104.967,90.533 v1(105.3,90.2)
AUX1_VREF: D15_1.K R26_1.1 R27_1.1 U8.14 | length 54.1
  Top Layer w0.254: U8.14@104.239,84.828 104.239,86.539 105.1,87.4 105.1,88.7 v1(104.8,89)
  Top Layer w0.508: D15_1.K@111.605,109.728 112.177,110.3 v1(114,110.3)
  Bottom Layer w0.254: v1(104.8,89) 104.5,89.3 104.5,105.9 103.64,106.76 100.34,106.76 97.775,109.325 97.775,111.667 98.008,111.9 109,111.9 109.728,111.172 R27_1.1@109.728,110.3 ; R27_1.1@109.728,110.236 R27_1.1@109.728,110.3 ; 114.3,110 v1(114,110.3) R27_1.1@109.728,110.3
  Bottom Layer w0.508: R26_1.1@114.3,108.712 114.3,110
AUX2_SW: R28_2.1 U8.15 | length 40.6
  Top Layer w0.254: U8.15@103.739,84.828 103.739,87.239 v1(104.3,87.8)
  Bottom Layer w0.254: R28_2.1@97.656,120.212 97.656,118.602 97.254,118.2 97.254,109.109 100.124,106.239 103.424,106.239 104.02,105.643 104.02,88.08 v1(104.3,87.8)
AUX2_VREF: D15_2.K R26_2.1 R27_2.1 U8.21 | length 68.8
  Top Layer w0.254: U8.21@100.933,80.528 102.228,80.528 102.5,80.8 v1(102.5,82)
  Top Layer w1: D15_2.K@111.097,119.38 111.417,119.7 v1(113.4,119.7)
  Bottom Layer w0.254: v1(102.5,82) 102.5,86.1 103.525,87.125 103.525,105.496 103.236,105.785 99.936,105.785 96.8,108.921 96.8,120.676 97.307,121.183 108.864,121.183 109.728,120.32 R27_2.1@109.728,119.888 113.212,119.888 v1(113.4,119.7) 115.128,119.7 R26_2.1@115.316,119.888
BATT-3V3: C37.2 C38.2 C39.1 C40.1 C42.2 C44.1 C47.2 R44.1 T1.1 U10.16 U11.1 U11.7 U11.9 U12.3 U12.4 U13.3 | length 205.6
  Top Layer w0.254: v1(6.3,118.6) 8.94,121.24 40.86,121.24 41.148,120.952 C40.1@41.148,120.5 ; C40.1@41,120.5 C40.1@41.148,120.5 ; C40.1@41.148,120.396 C40.1@41.148,120.5 ; U11.7@43.48,116.096 45.104,116.096 45.462,115.738 ; U11.1@43.48,119.996 46,119.996 ; C42.2@50.211,113.9 50.115,113.996 49.86,114.251 U11.9@49.86,115.446 49.212,115.446 U12.3@48.052,114.286 47.386,114.286 ; v1(51.8,110.3) 47.5,110.3 46.7,111.1 46.7,113.6 47.386,114.286 ; v1(70.7,111) 70.3,110.6 57.7,110.6 54.3,114 54.3,117.175 50.475,121 47.414,121 ; 73.152,111 73.2,111 ; C40.1@41.148,120.5 43.984,120.5 44.484,121 47.414,121 ; 45.462,115.738 U12.4@45.462,114.286 47.386,114.286 ; 45.462,115.738 45.462,119.458 46,119.996 ; 46,119.996 46.41,119.996 47.414,121
  Top Layer w0.5: C38.2@73.281,111.179 75.584,111.179 U10.16@78.455,111.179
  Top Layer w1: v1(70.7,111) 72.844,111 C38.2@73.152,111.308
  Bottom Layer w0.254: C47.2@9.017,54.864 9.286,54.595 U13.3@9.286,52.832
  Bottom Layer w0.5: v1(6.3,118.6) 2.6,114.9 2.6,100.8 9.3,94.1 9.3,90.3 7.7,88.7 7.7,57.3 9.017,55.983 C47.2@9.017,54.864 ; v1(70.7,111) 72.1,111 72.352,111.252 R44.1@73.66,111.252
  Bottom Layer w1: T1.1@51.816,92.299 v1@51.816,110.3 ; v1(70.7,111) C39.1@70.7,115.6
BATTGND: C37.1 C38.1 C39.2 C40.2 C41.2 C42.1 C43.2 C44.2 C45.2 C46.2 C47.1 D10.A D11.K J4.1 R9.2 R10.1 R44.2 R48.2 R52.2 T1.3 TP8.0 U10.9 U10.10 U10.15 U11.6 U11.10 U11.11 U12.2 U13.1 U13.2 | length 364
  Top Layer w0.254: v1(38.2,120.5) C40.2@39.539,120.5 ; C46.2@40.513,112.268 40.7,112.455 v1(40.7,113.9) 41.583,113.9 42.083,114.4 ; C43.2@42.291,112.776 42.083,112.984 42.083,114.4 ; U11.6@43.48,116.746 42.246,116.746 42.083,116.583 42.083,114.4 ; U12.2@48.052,113.329 48.871,113.329 49.7,112.5 v1(51.3,112.5) 51.608,112.808 51.608,113.792 51.608,115.5 ; U11.10@49.86,116.096 51.012,116.096 51.608,115.5 ; U11.11@49.86,116.746 50.989,116.746 51.608,116.127 51.608,115.5
  Top Layer w0.5: R48.2@32.385,118.452 R48.2@32.429,118.452 ; R48.2@32.429,118.471 R48.2@32.429,118.452 ; v1@35.148,118.452 R48.2@32.429,118.452 ; C38.1@73.2,114.96 73.252,114.908 75.584,112.576 ; 75.584,118.872 75.584,112.576 ; 75.584,119.004 U10.9@77.222,120.642 ; U10.15@78.482,112.422 75.738,112.422 75.584,112.576 ; U10.10@78.482,118.772 78.482,120.642 U10.9@78.482,120.882
  Top Layer w1: R52.2@32.385,114.808 R48.2@32.385,118.452
  Bottom Layer w0.254: U13.2@8.636,52.832 U13.1@7.986,52.832 7.62,53.198 C47.1@7.62,54.864 6.4,56.084 6.4,86.3 1.9,90.8 1.9,116.4 4.9,119.4 36.2,119.4 ; v1(38.2,120.5) 46,120.5 47.1,119.4 ; v1(40.7,113.9) 43.488,113.9 43.9,113.9
  Bottom Layer w0.5: R10.1@13.208,48.768 14.478,48.768 R9.2@16.764,51.054 ; v1(51.3,112.5) 51.3,115.2
  Bottom Layer w0.508: D11.K@5.248,111.216 7.584,111.216 14,104.8 ; C41.2@33.401,118.364 v1@35.164,118.364 ; v1(35.2,118.4) 36.2,119.4 47.1,119.4 47.1,115.3
  Bottom Layer w1: C45.2@33.401,114.808 37.009,111.2 ; T1.3@54.356,92.299 54.356,112.144
  Bottom Layer w2: J4.1@23.735,54.48 19.82,54.48 9.8,64.5 9.8,86.9 14,91.1 14,104.8 14,112.3 16.6,114.9 20.3,114.9 24,111.2 37.009,111.2 40.788,111.2 43.488,113.9 43.688,114.1 ; 45.2,115.2 51.3,115.2 54.356,112.144 57.2,109.3 71.404,109.3 71.504,109.4 74,109.4 75.3,108.1
  Bottom Layer w3: R9.2@16.764,51.054 20.309,51.054 J4.1@23.735,54.48
  other v1: 75.5,121
BATTVCC: C15.1 C17.1 D5.K D8.A F5.1 R45.1 TP5.0 U6.1 | length 136.5
  Top Layer w0.5: D8.A@5.08,92.964 1.9,96.144 1.9,114.6 4,116.7 8,116.7 ; TP5.0@11.176,116.332 10.808,116.7 8,116.7 ; R45.1@15.456,118.452 9.752,118.452 8,116.7
  Top Layer w2: C17.1@11.176,39.116 3.048,47.244 D5.K@3.048,47.752 3.048,52.148 14.732,63.832 F5.1@14.732,83.82 19.112,88.2 27,88.2 29.5,85.7 29.5,84.328 C15.1@29.5,84.292 ; C15.1@29.464,84.328 C15.1@29.5,84.292 ; C15.1@29.5,84 C15.1@29.5,84.292 ; U6.1@32.512,75.692 32.512,81.28 C15.1@29.5,84.292
  Top Layer w3: D8.A@5.588,92.964 F5.1@14.732,83.82
"BATTVCC MEASURE": C41.1 R47.1 U11.3 | length 16.8
  Top Layer w0.254: v1(36.5,117) 38.196,118.696 U11.3@43.48,118.696
  Bottom Layer w0.254: C41.1@32.004,118.364 R47.1@29.972,118.364 31.336,117 v1(36.5,117)